# Altium PCB MobileRobot.PcbDoc
Units mil, origin at the board's own origin, x right, y up, seen from the top; angles counter-clockwise.
Board outline 4645.67 x 3188.98 mil, 2 copper layers (Top Layer, Bottom Layer); 85 components, 120 nets, 419 pads, 133 vias.
Unrouted connection lines stored in the file: 2.
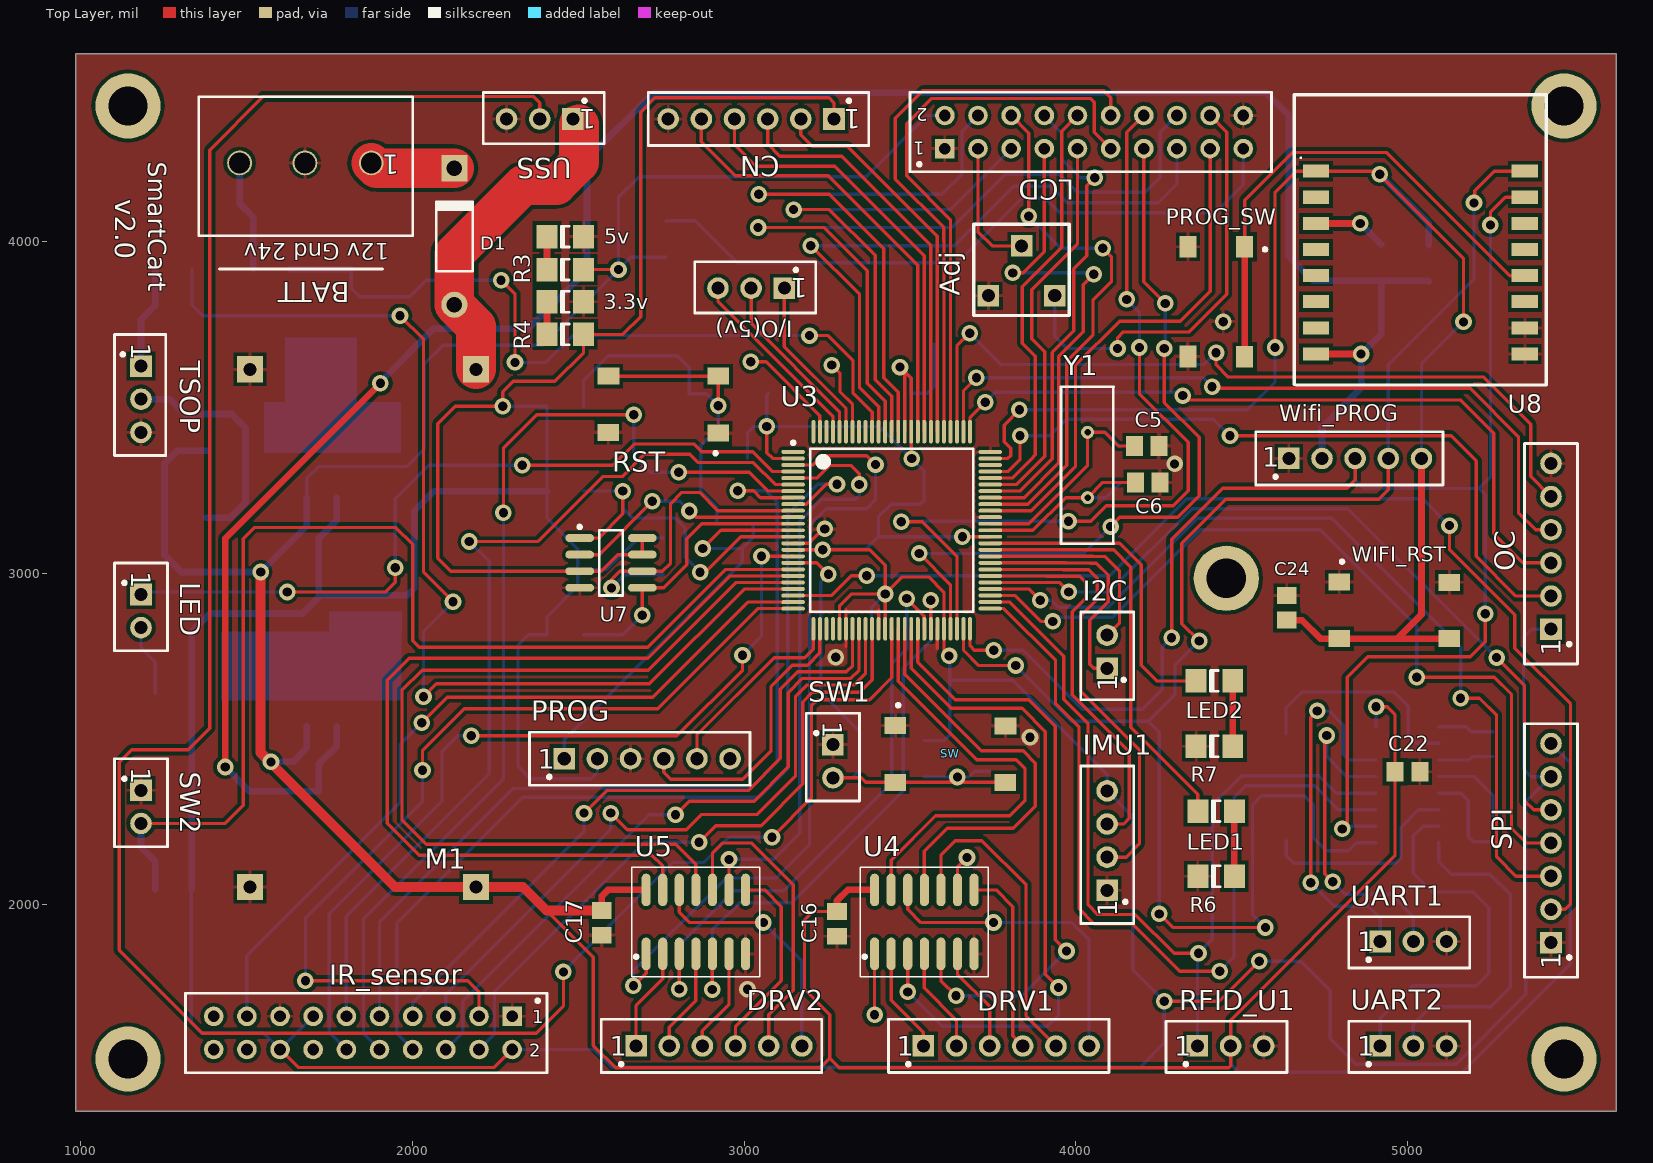
[diagram p0: Top Layer view]
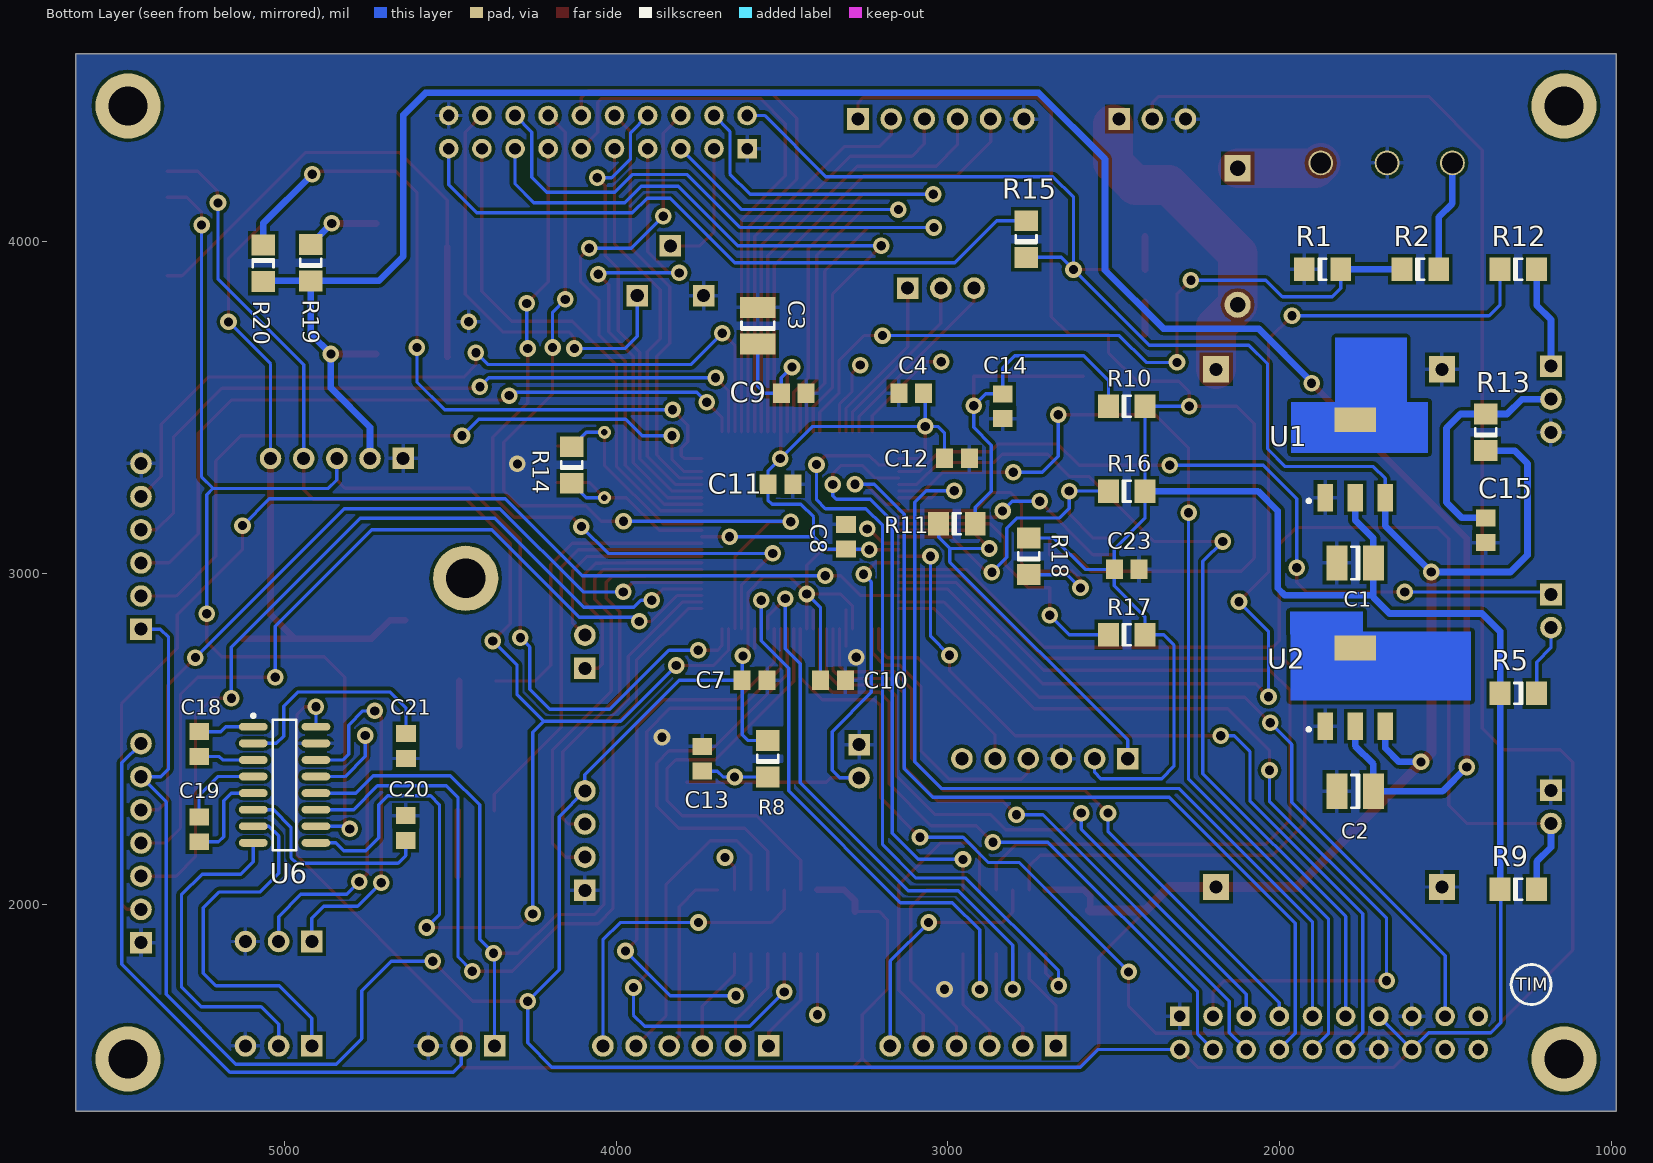
[diagram p1: Bottom Layer view, seen from below]

## Layer stack, top to bottom
Top Solder: solder mask 0.4, Solder Resist, Dk 3.5
Top Layer: signal copper 1.4
Dielectric 1: dielectric 12.6, FR-4, Dk 4.8
Bottom Layer: signal copper 1.4
Bottom Solder: solder mask 0.4, Solder Resist, Dk 3.5

## Board outline
984.25,1377.95 5629.92,1377.95 5629.92,4566.93 984.25,4566.93

## Design rules (kind name [scope] priority, off if disabled: settings)
Clearance Clearance_5 [InNamedPolygon('Bottom Layer-GND Net')] p1: gap=10
Clearance Clearance_4 [InNamedPolygon('Top Layer-GND Net')] p2: gap=11
Clearance Clearance_3 [InNamedPolygon('Bottom Layer-GND Net')] p3: gap=11
Clearance Clearance_2 [InNamedPolygon('Top Layer-GND Net')] p4: gap=11
Clearance Clearance_1 [InNamedPolygon('Bottom Layer-GND Net')] p5: gap=11
Clearance [All] p6: gap=10
PlaneClearance "Schematic Power Plane Clearance_11" [InNet('12V_BAT')] p1: clearance=20
PlaneClearance "Schematic Power Plane Clearance_10" [InNet('NetD3_1')] p2: clearance=20
PlaneClearance "Schematic Power Plane Clearance_9" [InNet('Net5v_1')] p3: clearance=20
PlaneClearance "Schematic Power Plane Clearance_8" [InNet('3.3V_WIFI')] p4: clearance=20
PlaneClearance "Schematic Power Plane Clearance_7" [InNet('3.3V')] p5: clearance=20
PlaneClearance "Schematic Power Plane Clearance_4" [InNet('GND_POWER')] p6: clearance=20
PlaneClearance "Schematic Power Plane Clearance" [InNet('Net3.3v_1')] p7: clearance=20
PlaneClearance "Schematic Power Plane Clearance_3" [InNet('3.3V_WIFI')] p8: clearance=20
PlaneClearance "Schematic Power Plane Clearance_2" [InNet('3.3V')] p9: clearance=20
PlaneClearance "Schematic Power Plane Clearance_1" [InNet('GND_POWER')] p10: clearance=20
PlaneClearance [All] p11: clearance=20
PolygonConnect PolygonConnect_6 [All vs IsNamedPolygon('Top Layer-GND Net')] p1: connectstyle=Relief reliefconductorwidth=10 reliefentries=4 polygonreliefangle="90 Angle" airgapwidth=10
PolygonConnect PolygonConnect_5 [All vs IsNamedPolygon('Bottom Layer-GND Net')] p2: connectstyle=Relief reliefconductorwidth=12 reliefentries=4 polygonreliefangle="90 Angle" airgapwidth=11
PolygonConnect PolygonConnect_4 [All vs IsNamedPolygon('Top Layer-GND Net')] p3: connectstyle=Relief reliefconductorwidth=12 reliefentries=4 polygonreliefangle="90 Angle" airgapwidth=11
PolygonConnect PolygonConnect_3 [All vs IsNamedPolygon('Bottom Layer-GND Net')] p4: connectstyle=Relief reliefconductorwidth=12 reliefentries=4 polygonreliefangle="90 Angle" airgapwidth=11
PolygonConnect PolygonConnect_2 [All vs IsNamedPolygon('Bottom Layer-GND Net')] p5: connectstyle=Relief reliefconductorwidth=12 reliefentries=4 polygonreliefangle="90 Angle" airgapwidth=11
PolygonConnect PolygonConnect_1 [All vs IsNamedPolygon('Top Layer-GND Net')] p6: connectstyle=Relief reliefconductorwidth=12 reliefentries=4 polygonreliefangle="90 Angle" airgapwidth=11
PolygonConnect [All] p7: connectstyle=Relief reliefconductorwidth=10 reliefentries=4 polygonreliefangle="90 Angle" airgapwidth=10
RoutingVias [All] p1: holewidth=28 width=50 viastyle="Through Hole" minholewidth=28 minwidth=50 maxholewidth=28 maxwidth=50
SolderMaskExpansion [All] p1: expansion=4
Width Width2 [InNet('5V')] p1: maxlimit=30 minlimit=10 preferedwidth=20
Width Width1 [InNet('12V_BAT')] p2: maxlimit=120 minlimit=40 preferedwidth=80
Width [All] p3: maxlimit=20 minlimit=10 preferedwidth=10
29 further rules are at their usual default settings.

## Classes and differential pairs
component class Wifi: C24 PROG_SW R19 R20 U8 Wifi_PROG WIFI_RST
component class Power_Supply: 3.3v 5v BATT C1 C2 D1 M1 R1 R2 R3 R4 U1 U2 USS
component class Microcontroller: C3 C4 C5 C6 C7 C8 C9 C10 C11 C12 C13 C14 C15 CN I2C I/O(5v) IMU1 IR_sensor LED LED1 LED2 OC PROG R5 R6 R7 R8 R9 R10 R11 R12 R13 R14 RST SPI SW SW1 SW2 TSOP U3 Y1
component class Memory: C23 R16 R17 R18 U7
component class Level_Shifter: C16 C17 DRV1 DRV2 U4 U5
component class LCD: Adj LCD R15
component class Debug: C18 C19 C20 C21 C22 RFID_U1 U6 UART1 UART2

## Components (designator, comment, footprint, x,y, rotation, side; value= is the part's Value field where it differs from the comment)
3.3v "3.3v_PWR" LED_SMD 2460.63,3818.9 r0 top (schematic designator D3)
5v "5v_PWR" LED_SMD 2460.63,4015.75 r0 top (schematic designator D2)
Adj "RES_POT" "Pot 3pin" 3838.58,3917.32 r0 top (schematic designator Pot)
BATT "H1" BATTERY_3PIN 1850.39,4212.6 r180 top
C1 "10uF/16V / tantalum" CAP_TANTALUM 1771.65,3031.5 r0 bottom
C2 "10uF/16V / tantalum" 1210 1771.65,2342.52 r0 bottom
C3 "10uF/16V / tantalum" CAP_TANTALUM 3573,3747 r90 bottom
C4 "100nF/ 16 Volts" CAP_CERAMIC 3110.24,3543.31 r0 bottom
C5 "22pF" CAP_CERAMIC 4214,3384 r180 top
C6 "22pF" CAP_CERAMIC 4217,3274 r180 top
C7 "100nF/ 16 Volts" CAP_CERAMIC 3582.68,2677.17 r180 bottom
C8 "100nF/ 16 Volts" CAP_CERAMIC 3307.09,3110.24 r90 bottom
C9 "100nF/ 16 Volts" CAP_CERAMIC 3464.57,3543.31 r180 bottom
C10 "100nF/ 16 Volts" CAP_CERAMIC 3346.46,2677.17 r180 bottom
C11 "100nF/ 16 Volts" CAP_CERAMIC 3505,3269 r180 bottom
C12 "100nF/ 16 Volts" CAP_CERAMIC 2972.44,3346.46 r180 bottom
C13 "100nF/ 16 Volts" CAP_CERAMIC 3740.16,2440.94 r90 bottom
C14 "100nF/ 16 Volts" CAP_CERAMIC 2834.65,3503.94 r270 bottom
C15 "100nF/ 16 Volts" CAP_CERAMIC 1377.95,3129.92 r270 bottom
C16 "100nF/ 16 Volts" CAP_CERAMIC 3280,1943 r270 top
C17 "100nF/ 16 Volts" CAP_CERAMIC 2571,1946 r270 top
C18 "1uF" CAP_CERAMIC 5258,2485 r270 bottom
C19 "1uF" CAP_CERAMIC 5258,2228 r270 bottom
C20 "1uF" CAP_CERAMIC 4635,2232 r90 bottom
C21 "1uF" CAP_CERAMIC 4634,2479 r270 bottom
C22 "100nF/ 16 Volts" CAP_CERAMIC 5000,2401.57 r0 top
C23 "100nF/ 16 Volts" CAP_CERAMIC 2460.63,3011.81 r0 bottom
C24 "100nF/ 16 Volts" CAP_CERAMIC 4636,2896 r90 top
CN "H4" 1x6_single 3070.87,4370.08 r180 top
D1 "Diode 1N4007" D-IN4007 2125.98,4015.75 r90 top
DRV1 "1Step/2DC" 1x6_single 3740.16,1574.8 r0 top
DRV2 "1Step/2DC" 1x6_single 2874.02,1574.8 r0 top
I2C "H6" 1x2_single 4094.49,2913.39 r90 top
I/O(5v) "H7" "1x3_single - duplicate" 2921,3860 r180 top (schematic designator 5v_OUT)
IMU1 "Header 4" 1x4_single 4094.49,2244.09 r90 top
IR_sensor "Header 10X2A" "10x2 row_ 2.54mm pitch" 1850.39,1614.17 r180 top
LCD "Header 10X2A" "10x2 row_ 2.54mm pitch" 4055.12,4330.71 r0 top
LED "H8" 1x2_single 1181.1,2736.22 r270 top
LED1 "LED1" LED_SMD 4423.19,2283.17 r0 top (schematic designator D4)
LED2 "LED2" LED_SMD 4418.19,2675.46 r0 top (schematic designator D5)
M1 "Buck Regulator" BUCKREGULATOR 1850.39,2834.65 r0 top
OC "H3" 1x6_single 5433.07,3031.5 r90 top
PROG "H10" 1x6_single 2657.48,2440.94 r0 top
PROG_SW "SW-SMD" SWITCH_SMD 4409.45,3818.9 r90 top
R1 "100K" RES_SMD 1870.08,3917.32 r180 bottom
R2 "1M" RES_SMD 1574.8,3917.32 r180 bottom
R3 "330R" RES_SMD 2460,3916 r0 top
R4 "330R" RES_SMD 2460.63,3720.47 r0 top
R5 "47R" RES_SMD 1279.53,2637.8 r0 bottom
R6 "150R" RES_SMD 4423.19,2086.31 r0 top
R7 "150R" RES_SMD 4418.19,2478.61 r0 top
R8 "10K" RES_SMD 3543.31,2440.94 r90 bottom
R9 "10K" RES_SMD 1279.53,2047.24 r180 bottom
R10 "4.7K" RES_SMD 2460.63,3503.94 r180 bottom
R11 "1K" RES_SMD 2972.44,3149.61 r180 bottom
R12 "220R" RES_SMD 1279.53,3917.32 r180 bottom
R13 "220R" RES_SMD 1377.95,3425.2 r90 bottom
R14 "1M" RES_SMD 4133.86,3326.77 r90 bottom
R15 "47R" RES_SMD 2764,4008 r90 bottom
R16 "4.7K" RES_SMD 2460.63,3248.03 r180 bottom
R17 "4.7K" RES_SMD 2460.63,2814.96 r180 bottom
R18 "4.7K" RES_SMD 2755.91,3051.18 r90 bottom
R19 "10K" RES_SMD 4921.26,3937.01 r90 bottom
R20 "10K" RES_SMD 5065,3935 r270 bottom
RFID_U1 "H15" "1x3_single - duplicate" 4566.93,1574.8 r0 top
RST "SW-SMD" SWITCH_SMD 2755.91,3523.62 r0 top
SPI "H5" 1x7_single 5433.07,2086.61 r90 top
SW "SW-SMD" SWITCH_SMD 3622.05,2440.94 r180 top
SW1 "H11" 1x2_single 3267.72,2283.46 r270 top
SW2 "H12" 1x2_single 1181.1,2145.67 r270 top
TSOP "H9" "1x3_single - duplicate" 1181.1,3425.2 r270 top
U1 "LM1117" LM1117 1771.65,3228.35 r180 bottom
U2 "LM1117" LM1117 1771.65,2539.37 r180 bottom
U3 "DSPIC33FJ256MC710A-I/PF" DSPIC33FJ256MC710-I/PF 3444.88,3129.92 r0 top
U4 "SN74HCT14MDREP" SN74HCT14MDREP 3543.31,1948.82 r90 top
U5 "SN74HCT14MDREP" SN74HCT14MDREP 2854.33,1948.82 r90 top
U6 "MAX3232D" MAX232D 5000,2362.2 r180 bottom
U7 "25LC256" 25LC256 2598.43,3031.5 r0 top
U8 "esp8266-07" esp8266-07 5039,3898 r0 top
UART1 "H13" "1x3_single - duplicate" 5118.11,1889.76 r0 top
UART2 "H14" "1x3_single - duplicate" 5118.11,1574.8 r0 top
USS "H2" "1x3_single - duplicate" 2283.46,4370.08 r180 top
Wifi_PROG "H18" 1x5_single 4842.52,3346.46 r0 top
WIFI_RST "SW-SMD" SWITCH_SMD 4960.63,2874.02 r180 top
Y1 "10MHz" CRYSTAL_10MHZ 4035.43,3326.77 r90 top

## Footprints (in the part's own frame and the unit in brackets; to place one, negate y for a bottom-side part, rotate by r counter-clockwise, add the part's x,y. Pads: shape width x height; smd on the part's side, far side on the other; paste and mask are expansions set on the pad)
1x2_single [mm] "Connector; IDC, Low Profile Male Header, Thru-Hole; 10 Position; Vertical; Pitch 2.54 mm; Body 20.32 x 9.2 x 9.45 mm (LxWxH)"
  rect 1.65x1.65 hole 1: 1(-5.08,0)
  round 1.65 hole 1: 2(-2.54,0)
  silkscreen extent -7.49,-2.03 -0.76,2.03
"1x3_single - duplicate" [mm] "Connector; IDC, Low Profile Male Header, Thru-Hole; 10 Position; Vertical; Pitch 2.54 mm; Body 20.32 x 9.2 x 9.45 mm (LxWxH)"
  rect 1.65x1.65 hole 1: 1(-5.08,0)
  round 1.65 hole 1: 2(-2.54,0) 3(0,0)
  silkscreen extent -7.49,-2.03 1.78,1.91
1x4_single [mm] "Connector; IDC, Low Profile Male Header, Thru-Hole; 10 Position; Vertical; Pitch 2.54 mm; Body 20.32 x 9.2 x 9.45 mm (LxWxH)"
  rect 1.65x1.65 hole 1: 1(-5.08,0)
  round 1.65 hole 1: 2(-2.54,0) 3(0,0) 4(2.54,0)
  silkscreen extent -7.62,-2.03 4.45,2.03
1x5_single [mm] "Connector; IDC, Low Profile Male Header, Thru-Hole; 10 Position; Vertical; Pitch 2.54 mm; Body 20.32 x 9.2 x 9.45 mm (LxWxH)"
  rect 1.65x1.65 hole 1: 1(-5.08,0)
  round 1.65 hole 1: 2(-2.54,0) 3(0,0) 4(2.54,0) 5(5.08,0)
  silkscreen extent -7.62,-2.03 6.73,2.03
1x6_single [mm] "Connector; IDC, Low Profile Male Header, Thru-Hole; 10 Position; Vertical; Pitch 2.54 mm; Body 20.32 x 9.2 x 9.45 mm (LxWxH)"
  rect 1.65x1.65 hole 1: 1(-5.08,0)
  round 1.65 hole 1: 2(-2.54,0) 3(0,0) 4(2.54,0) 5(5.08,0) 6(7.62,0)
  silkscreen extent -7.75,-2.03 9.14,2.03
1x7_single [mm] "Connector; IDC, Low Profile Male Header, Thru-Hole; 10 Position; Vertical; Pitch 2.54 mm; Body 20.32 x 9.2 x 9.45 mm (LxWxH)"
  rect 1.65x1.65 hole 1: 1(-5.08,0)
  round 1.65 hole 1: 2(-2.54,0) 3(0,0) 4(2.54,0) 5(5.08,0) 6(7.62,0) 7(10.16,0)
  silkscreen extent -7.75,-2.03 11.68,2.03
"10x2 row_ 2.54mm pitch" [mm] "Connector; IDC, PCB Transition - 2 Rows, Thru-Hole; 34 Position; Vertical; Pitch 2.54 mm; dual row"
  rect 1.5x1.5 hole 0.9: 1(-11.43,-1.27)
  round 1.5 hole 0.9: 2(-11.43,1.27) 3(-8.89,-1.27) 4(-8.89,1.27) 5(-6.35,-1.27) 6(-6.35,1.27) 7(-3.81,-1.27) 8(-3.81,1.27) 9(-1.27,-1.27) 10(-1.27,1.27) 11(1.27,-1.27) 12(1.27,1.27) 13(3.81,-1.27) 14(3.81,1.27) 15(6.35,-1.27) 16(6.35,1.27) 17(8.89,-1.27) 18(8.89,1.27) 19(11.43,-1.27) 20(11.43,1.27)
  silkscreen extent -14.1,-3.05 13.59,3.05
25LC256 [mm] "SOIC, 8-Leads, Body 4.9x3.8mm, Pitch 1.27mm, IPC Medium Density"
  oval 2.2x0.6 smd: 1(-2.4,1.905) 2(-2.4,0.635) 3(-2.4,-0.635) 4(-2.4,-1.905) 5(2.4,-1.905) 6(2.4,-0.635) 7(2.4,0.635) 8(2.4,1.905)
  silkscreen extent -2.52,-2.5 0.9,2.88, body extent -2,-2.5 2,2.5, height 1.75
1210 [mm]
  rect 1.6x2.7 smd: 1(-1.4,0) 2(1.4,0)
  silkscreen extent -0.3,-1.25 0.3,1.25
BATTERY_3PIN [mm] "Through Hole Power Connector 5.54X6.5 _ 6A"
  round 1.9 hole 1.6: 1(-0.635,-0.635) 2(4.445,-0.635) 3(9.449,-0.635)
  silkscreen extent -3.81,-5.72 12.57,4.95
BUCKREGULATOR [mm] "43mm length,20 mm width"
  rect 2.008x2.008 hole 1: Vin+(8.65,19.825) Vin-(-8.65,19.825) Vout+(8.65,-19.825) Vout-(-8.65,-19.825)
  body extent -10.24,-21.71 9.95,21.97, height 5
CAP_CERAMIC [mm] "Chip Capacitor; Body 2.0 x 1.2 mm (LxW typ)"
  rect 1.3x1.5 smd: 1(0.95,0) 2(-0.95,0)
CAP_TANTALUM [mm] "Chip Capacitor; Body 3.2 x 2.5 mm (LxW typ)"
  rect 1.6x2.7 smd: 1(-1.4,0) 2(1.4,0)
  silkscreen extent -0.3,-1.25 0.3,1.25
CRYSTAL_10MHZ [mm] "0.413\" L x 0.183\" W (10.50mm x 4.65mm)"
  round 1 hole 0.5: 1(-2.5,0) 2(2.5,0)
  silkscreen extent -6.02,-2 6,2.03
D-IN4007 [mm] "Diode, Axial; Body 5.2 x 2.7 mm (LxDia. max), Lead Dia. 0.86 mm (max)"
  round 2 hole 1.2: 1(-5.23,0)
  rect 2x2 hole 1.2: 2(5.23,0)
  silkscreen extent -2.65,-1.4 2.75,1.4
DSPIC33FJ256MC710-I/PF [mm] "Thin QFP, 100-Leads, Body 14x14mm, Pitch 0.5mm, IPC Medium Density"
  oval 1.8x0.3 smd: 1(-7.55,6) 2(-7.55,5.5) 3(-7.55,5) 4(-7.55,4.5) 5(-7.55,4) 6(-7.55,3.5) 7(-7.55,3) 8(-7.55,2.5) 9(-7.55,2) 10(-7.55,1.5) 11(-7.55,1) 12(-7.55,0.5) 13(-7.55,0) 14(-7.55,-0.5) 15(-7.55,-1) 16(-7.55,-1.5) 17(-7.55,-2) 18(-7.55,-2.5) 19(-7.55,-3) 20(-7.55,-3.5) 21(-7.55,-4) 22(-7.55,-4.5) 23(-7.55,-5) 24(-7.55,-5.5) 25(-7.55,-6) 51(7.55,-6) 52(7.55,-5.5) 53(7.55,-5) 54(7.55,-4.5) 55(7.55,-4) 56(7.55,-3.5) 57(7.55,-3) 58(7.55,-2.5) 59(7.55,-2) 60(7.55,-1.5) 61(7.55,-1) 62(7.55,-0.5) 63(7.55,0) 64(7.55,0.5) 65(7.55,1) 66(7.55,1.5) 67(7.55,2) 68(7.55,2.5) 69(7.55,3) 70(7.55,3.5) 71(7.55,4) 72(7.55,4.5) 73(7.55,5) 74(7.55,5.5) 75(7.55,6)
  oval 0.3x1.8 smd: 26(-6,-7.55) 27(-5.5,-7.55) 28(-5,-7.55) 29(-4.5,-7.55) 30(-4,-7.55) 31(-3.5,-7.55) 32(-3,-7.55) 33(-2.5,-7.55) 34(-2,-7.55) 35(-1.5,-7.55) 36(-1,-7.55) 37(-0.5,-7.55) 38(0,-7.55) 39(0.5,-7.55) 40(1,-7.55) 41(1.5,-7.55) 42(2,-7.55) 43(2.5,-7.55) 44(3,-7.55) 45(3.5,-7.55) 46(4,-7.55) 47(4.5,-7.55) 48(5,-7.55) 49(5.5,-7.55) 50(6,-7.55) 76(6,7.55) 77(5.5,7.55) 78(5,7.55) 79(4.5,7.55) 80(4,7.55) 81(3.5,7.55) 82(3,7.55) 83(2.5,7.55) 84(2,7.55) 85(1.5,7.55) 86(1,7.55) 87(0.5,7.55) 88(0,7.55) 89(-0.5,7.55) 90(-1,7.55) 91(-1.5,7.55) 92(-2,7.55) 93(-2.5,7.55) 94(-3,7.55) 95(-3.5,7.55) 96(-4,7.55) 97(-4.5,7.55) 98(-5,7.55) 99(-5.5,7.55) 100(-6,7.55)
  silkscreen extent -7.67,-6.25 6.25,6.82, body extent -7,-7 7,7, height 1.2
esp8266-07 [mm] "TSOP, 8-Leads, Body 2.90x1.63mm, Pitch 0.65mm, IPC Medium Density"
  rect 2x1 smd: 0(-8,8) 1(-8,6) 2(-8,4) 3(-8,2) 4(-8,0) 5(-8,-2) 6(-8,-4) 7(-8,-6) 8(8,-6) 9(8,-4) 10(8,-2) 11(8,0) 12(8,2) 13(8,4) 14(8,6) 15(8,8)
  silkscreen extent -9.65,-8.38 9.65,13.84, body extent -8.53,-7.42 8.46,12.88, height 1.45
LED_SMD [mm] "Chip Capacitor; Body 6.4 x 3.2 mm (LxW typ)"
  rect 1.6x1.8 smd: 1(-1.4,0) 2(1.4,0)
  silkscreen extent -0.3,-0.8 0.3,0.8
LM1117 [mm] "SOT23, 3-Leads, Body 2.9x1.3mm, Pitch 0.95mm, Lead Span 2.5mm, IPC Low Density"
  rect 3.175x1.905 smd: 0(0,5.969)
  rect 1.2x2.1 smd: 1(-2.3,0) 2(0,0) 3(2.3,0)
  silkscreen extent -3.68,-0.38 -3.43,-0.13, body extent -3.84,0.91 3.84,5.31, height 1.1
MAX232D [mm] "SOIC, 16-Leads, Body 9.9x3.9mm, Pitch 1.27mm, IPC Medium Density"
  oval 2.2x0.6 smd: 1(-2.4,4.445) 2(-2.4,3.175) 3(-2.4,1.905) 4(-2.4,0.635) 5(-2.4,-0.635) 6(-2.4,-1.905) 7(-2.4,-3.175) 8(-2.4,-4.445) 9(2.4,-4.445) 10(2.4,-3.175) 11(2.4,-1.905) 12(2.4,-0.635) 13(2.4,0.635) 14(2.4,1.905) 15(2.4,3.175) 16(2.4,4.445)
  silkscreen extent -2.53,-5 0.9,5.42, body extent -1.95,-4.95 1.95,4.95, height 1.75
"Pot 3pin" [mm] "Through hole"
  rect 1.65x1.65 hole 1: 1(2.489,-2.032) 2(-0.051,1.778) 3(-2.591,-2.032)
  silkscreen extent -3.71,-3.56 3.61,3.43
RES_SMD [mm] "Chip Capacitor; Body 6.4 x 3.2 mm (LxW typ)"
  rect 1.6x1.8 smd: 1(-1.4,0) 2(1.4,0)
  silkscreen extent -0.3,-0.8 0.3,0.8
SN74HCT14MDREP [mm] "14-Pin Small Outline Integrated Circuit 1.27 mm Pitch, IPC Low Density"
  oval 2.5x0.7 smd: 1(-2.45,3.81) 2(-2.45,2.54) 3(-2.45,1.27) 4(-2.45,0) 5(-2.45,-1.27) 6(-2.45,-2.54) 7(-2.45,-3.81) 8(2.45,-3.81) 9(2.45,-2.54) 10(2.45,-1.27) 11(2.45,0) 12(2.45,1.27) 13(2.45,2.54) 14(2.45,3.81)
  silkscreen extent -4.2,-4.9 4.2,4.9, body extent -2,-4.38 2,4.38, height 1.75
SWITCH_SMD [mm] "Switch, Push Button, Tactile"
  rect 1.65x1.3 smd: 1(4.216,-2.54) 2(-4.216,-2.515) 3(4.216,1.803) 4(-4.191,1.803)
  silkscreen extent 3.88,-4.22 4.13,-3.97, body extent -4.57,-3.35 4.57,2.67, height 1.75

## Part data
3.3v 5v LED1 LED2: library part LED_SMD, "Typical INFRARED GaAs LED_throughole"
Adj: "Tapped Resistor"
BATT: library part BATTERY_3PIN, "Header, 3-Pin"
C1 C2 C3: library part C_0
C4 C5 C6 C7 C8 C9 C10 C11 C12 C13 C14 C15 C16 C17 C18 C19 C20 C21 C22 C23 C24: library part "CAP NP"
CN DRV1 DRV2 OC PROG: library part "Header 6", "Header, 6-Pin"
D1: "1 Amp General Purpose Rectifier"
I2C LED SW1 SW2: library part "Header 2", "Header, 2-Pin"
I/O(5v) RFID_U1 TSOP UART1 UART2 USS: library part "Header 3", "Header, 3-Pin"
IMU1: "Header, 4-Pin"
IR_sensor LCD: library part "Header 10x2", "Header, 20Pin, Dual row"
M1: library part Regulator, "buck regulator\"
PROG_SW RST SW WIFI_RST: "Switch"
R1 R2 R3 R4 R5 R6 R7 R8 R9 R10 R11 R12 R13 R14 R15 R16 R17 R18 R19 R20: library part RESISTOR
SPI: library part "Header 7_1", "Header, 6-Pin"
U3: library part DSPIC33FJ256MC710-I/PF, "High-Performance 16-bit Digital Signal Controller, 256 KB Flash, 30 KB RAM, 100-Pin TQFP, Industrial Temperature"
U4 U5: library part 74HC153D
U6: library part MAX232D, "Dual EIA-232 Driver/Receiver"
U8: "4-Bit Loadable Cascadable Binary Counter with Clock Enable and Asynchronous Clear, Single Pin Version"
Wifi_PROG: library part "Header 5", "Header, 5-Pin"
Y1: library part XTAL, "Crystal Oscillator"

## Free pads (board coordinates)
  round 196.85 hole 118.11: 1(1141.73,4409.45) 2(1141.73,1535.43) 3(5472.44,1535.43) 4(5472.44,4409.45) 5(4454,2985)

## Via types
v1: diameter 50, hole 28, Top Layer to Bottom Layer, 133 vias

## Nets (pads, with @x,y where several pads share a name; then routed paths per layer and width w, separated by ;. In a path a pad name is that pad's centre, name@x,y a point inside that pad or via, vN(x,y) a via of type N, cw(c..) or ccw(c..) an arc to the next point about the centre after c; other vN are vias at no path point)
3.3V: C1.1 C3.1 C4.2 C7.2 C8.2 C9.2 C10.2 C11.2 C12.2 C23.1 CN.1 IMU1.4 IR_sensor.2 IR_sensor.13 IR_sensor.16 OC.1 PROG.2 R4.2 R5.2 R8.2 R9.1 R10.2 R16.2 R17.2 R18.2 SPI.6 U1.2 U3.2 U3.16 U3.30 U3.37 U3.46 U3.62 U3.85 U3.86 U7.3 U7.7 U7.8 | length 19690.1
  Top Layer w10: IR_sensor.16 1654.57,1510 2246.22,1510 IR_sensor.2 ; U7.8 U7.7 2618.5,3056.5 2568.5,3006.5 U7.3 2115.5,3006.5 2076,3046 2076,3451 2129,3504 v1(2272,3504) 2272,3547 2304,3579 2429,3579 2515.75,3665.75 R4.2 2634.47,3720.47 2688,3774 2688,4391 2731,4434 3256,4434 3270.87,4419.13 CN.1 ; v1(3068,3443) 3068,3364 3085.54,3346.46 U3.2 ; U3.16 v1(3236.87,3070.87) 3379.13,3070.87 3425.2,3024.8 v1(3425.2,2937.8) ; U3.30 3287.4,2901.4 3323.8,2937.8 v1(3425.2,2937.8) ; U3.37 v1(3425.2,2937.8) ; v1(3470,3622) v1@3484.25,3607.75 ; U3.86 v1@3484.25,3607.75 ; v1(3505,3346) 3503.94,3347.06 U3.85 3503.94,3588.06 v1@3484.25,3607.75 ; v1(3618,2751) 3602.36,2766.64 U3.46 3602.36,2942.64 3556,2989 3476.39,2989 v1(3425.2,2937.8) ; v1(3658.24,3110.24) U3.62 ; v1(4267,1710) 4433,1710 v1(4553,1830)
  Bottom Layer w10: R9.1@1333,2047.24 1333,1644 1362,1615 1549.57,1615 IR_sensor.16 IR_sensor.13 ; v1(2272,3504) 2272.06,3503.94 R10.2 R16.2 2405.51,3165.49 2498.03,3072.97 C23.1 ; IR_sensor.2 2546.83,1564.17 2600,1511 4194,1511 4267,1584 v1(4267,1710) 4172,1805 4172,2266.58 IMU1.4 4094.49,2392.51 3809.83,2677.17 C7.2 ; PROG.2 2557.48,2399.48 2539,2381 2355,2381 2318,2418 2318,2784 2348.96,2814.96 R17.2 2405.51,2869.51 2498.03,2962.03 C23.1 ; R18.2 2680.3,3106.3 2585.81,3011.81 C23.1 ; C12.2 3009.84,3422.84 3030,3443 v1(3068,3443) ; C4.2 3068,3538.47 v1(3068,3443) ; v1(3236.87,3070.87) 3238.83,3072.83 C8.2 3366.83,3072.83 3405,3111 ; C10.2 3383.86,2896.46 v1(3425.2,2937.8) ; v1(3470,3622) 3501.97,3590.03 C9.2 3552.31,3543.31 3573,3564 C3.1 ; R8.2 3603.06,2496.06 3620.08,2513.08 C7.2 ; v1(3618,2751) 3620.08,2748.92 C7.2 ; v1(3658.24,3110.24) 3405.76,3110.24 3405,3111 ; v1(4553,1830) 4678,1830 4767,1741 4767,1597 4844,1520 5147,1520 5357,1730 5357,2310.54 SPI.6 5373.39,2386.61 5350,2410 5350,2807 5374.5,2831.5 OC.1 ; v1(3068,3443) 3408,3443 v1(3505,3346) 3542.4,3308.6 C11.2 3542.4,3220.4 3530,3208 3443,3208 3405,3170 3405,3111
  Bottom Layer w20: R9.1 1334.65,2824.65 1389,2879 1668,2879 1716.53,2927.53 1716.53,2933.47 ; U1.2 1771.65,3160.65 1716.53,3105.53 C1.1 1716.53,2933.47 ; R16.2 2065.03,3248.03 2005,3188 2005,2955 1983.47,2933.47 1716.53,2933.47
3.3V_WIFI: C2.1 R19.1 R20.2 U2.2 U8.7 Wifi_PROG.2 | length 6837.7
  Top Layer w20: v1(1435,2416) 1435,3105 v1(1903,3573) ; U8.7@4724.04,3661.42 v1(4860.42,3661.42)
  Bottom Layer w20: v1(1435,2416) 1508.48,2342.52 C2.1 1716.53,2424.53 1771.65,2479.65 U2.2 ; v1(1903,3573) 1903,3578 2063,3738 2350,3738 2526,3914 2526,4249 2726,4449 4575,4449 4642,4382 4642,3956 4716.11,3881.89 R19.1 ; Wifi_PROG.2 4742.52,3440.52 4860.42,3558.42 v1(4860.42,3661.42) 4921.26,3722.26 R19.1 ; R20.2 5062.99,3881.89 R19.1
5V: C16.2 C17.2 C22.2 LCD.2 M1.Vout+ R3.2 R13.1 R15.1 RFID_U1.2 SPI.7 U1.3 U2.3 U4.14 U5.14 U6.16 | length 12604.8
  Top Layer w10: 2403.6,1983.4 2545,1842 2545,1576 2612,1509 3229,1509 3258,1538 ; R3.2 v1(2621,3916) ; C16.2 3207.4,1980.4 3182,1955 3182,1745 3258,1669 3258,1538 ; v1(4905.51,2597.51) 4939.49,2597.51 4962.6,2574.4 C22.2 4962.6,2148.6 4466.93,1652.93 RFID_U1.2 4466.93,1514.93 4461,1509 3287,1509 3258,1538
  Top Layer w20: C17.2 2571,2027 2589.27,2045.27 U5.14 ; C16.2 3280,2013 3312.27,2045.27 U4.14
  Top Layer w30: v1(1542,3004) 1542,2459 v1@1573,2428 ; v1@1573,2427 v1@1573,2428 ; v1(1573,2431.27) v1@1573,2428 ; C17.2 2403.6,1983.4 2332.87,2054.13 M1.Vout+ 1946.87,2054.13 v1@1573,2428
  Bottom Layer w10: U1.3 1681.1,3286.1 1717,3322 1983,3322 2036,3375 2036,3632 2092,3688 2393,3688 v1(2621,3916) ; R15.1 2657.88,3952.88 v1(2621,3916) ; LCD.2 3552.71,4380.71 3368,4196 2683,4196 2621,4134 v1(2621,3916) ; RFID_U1.2 4466.93,1519.07 4491,1495 5165,1495 5491,1821 5491,2428.68 SPI.7 ; U6.16 v1(4905.51,2597.51)
  Bottom Layer w20: R13.1 1291.08,3370.08 1252,3331 1252,3055 1303,3004 v1(1542,3004) 1681.1,3143.1 U1.3 ; v1(1573,2431.27) 1639.27,2431.27 1681.1,2473.1 U2.3
12V_BAT: D1.1 M1.Vin+ USS.1 | length 1002.8
  Top Layer w80: USS.1@2485.95,4370.08 USS.1@2502,4354.02
  Top Layer w120: M1.Vin+ 2190.94,3744.88 D1.1 2125.98,3962.98 2334,4171 2434,4171 2502,4239 USS.1@2502,4354.02
"24V BAT": BATT.3 R2.2 | length 337.4
  Bottom Layer w20: BATT.3 1478.39,4115.61 1519.69,4074.31 R2.2
CN1: CN.2 U3.81 | length 1174.9
  Top Layer w10: CN.2 3170.87,4323.13 3207,4287 3312,4287 3582.05,4016.95 3582.05,3992.04 3582.36,3991.72 3582.36,3991.32 ; U3.81 3582.68,3991.32
CN2: CN.3 U3.82 | length 1256.3
  Top Layer w10: CN.3 3070.87,4295.13 3108,4258 3295,4258 3562.99,3990.01 U3.82
CN3: CN.4 U3.83 | length 1319.2
  Top Layer w10: CN.4 2970.87,4292.13 3035,4228 3273,4228 3542.68,3958.32 3542.68,3954.69 ; U3.83 3543.31,3954.69
CN4: CN.5 U3.84 | length 1377.8
  Top Layer w10: CN.5 2870.87,4301.13 2973,4199 3254,4199 3523.31,3929.69 3523.31,3796.38 ; U3.84 3523.62,3796.38
CS1: LCD.15 U3.90 | length 1973.9
  Top Layer w10: v1(3201,3988) 3348,3841 3348,3560 3405.51,3502.49 U3.90
  Bottom Layer w10: v1(3201,3988) 3634,3988 3813,4167 3925,4167 3974,4118 4249,4118 4305.12,4174.12 LCD.15
CS2: LCD.16 U3.89 | length 2418.3
  Top Layer w10: v1(3042,4043) 3240,4043 3371,3912 3371,3573 3425.2,3518.8 U3.89
  Bottom Layer w10: v1(3042,4043) 3627,4043 3787,4203 3950,4203 4004,4149 4210,4149 4255,4194 4255,4330.59 LCD.16
DB0: LCD.7 U3.68 | length 1543.6
  Top Layer w10: U3.68 3844.35,3228.35 3949,3333 3949,3654 4023,3728 4023,3871 v1(4054,3902) ; v1(3810,3906) 3842,3906 3905.12,3969.12 LCD.7
  Bottom Layer w10: v1(3810,3906) 4054,3906 v1(4054,3902)
DB1: LCD.8 U3.69 | length 1403.3
  Top Layer w10: U3.69 3831.03,3248.03 3929,3346 3929,3666 3994,3731 3994,3918 4033,3957 4033,4169 v1(4057,4193)
  Bottom Layer w10: LCD.8 3956.83,4329 3956.83,4250.17 4014,4193 v1(4057,4193)
DB2: LCD.9 U3.70 | length 1200.3
  Top Layer w10: U3.70 3820.72,3267.72 3906,3353 3906,3668 3867,3707 3867,3855 4005.12,3993.12 LCD.9
DB3: LCD.10 U3.71 | length 1273.4
  Top Layer w10: U3.71 3808.4,3287.4 3865.54,3344.54 3878,3357 3878,3655 3839,3694 3839,3864 3958,3983 3958,4333.59 LCD.10
DB4: LCD.11 U3.79 | length 1745.6
  Top Layer w10: U3.79 3622.05,4066.95 3490,4199 3490,4356 3566,4432 4044,4432 4056,4420 4056,4329.83 LCD.11
DB5: LCD.12 U3.80 | length 1751.3
  Top Layer w10: 3602.05,4000.64 3602.05,4042.95 3456,4189 3456,4372 3539,4455 4085,4455 4105.12,4434.88 LCD.12 ; U3.80 3602.36,4000.64
DB6: LCD.13 U3.47 | length 2300.7
  Top Layer w10: v1(3528,3060) 3622.05,2965.95 U3.47 ; v1(4105,3141) 4133,3169 4307,3169 4372,3234 4372,3410 4267,3515 v1(4267,3678) ; LCD.13 4205.12,3878.88 v1(4270,3814)
  Bottom Layer w10: v1(3528,3060) 4024,3060 v1(4105,3141) ; v1(4267,3678) 4270,3681 v1(4270,3814)
DB7: LCD.14 U3.48 | length 2563.3
  Top Layer w10: v1(3474,3156) 3537,3156 3641.73,3051.27 U3.48 ; v1(3978,3157) 4045,3157 4092,3204 4294,3204 4339,3249 4339,3395 4192,3542 v1(4192,3681) ; v1(4154,3826) 4154,4329.59 LCD.14
  Bottom Layer w10: v1(3474,3156) 3474,3157 v1(3978,3157) ; v1(4154,3826) 4192,3788 v1(4192,3681)
DIR1+: U3.42 U4.5 | length 1821.1
  Top Layer w10: U3.42 3523.62,2732.38 3637,2619 3858,2619 3938,2539 3938,1895 v1(3972,1861) ; U4.5 3593.31,1771.69 v1(3639,1726)
  Bottom Layer w10: v1(3639,1726) 3837,1726 v1(3972,1861)
DIR1+_5V: DRV1.3 U4.6 | length 317.7
  Top Layer w10: U4.6 3643.31,1791.69 3740.16,1694.84 DRV1.3
DIR1-: U3.39 U4.13 | length 1314
  Top Layer w10: U4.13 3443.31,2135.31 3577,2269 3801,2269 3847,2315 3847,2411 3820,2438 3701,2438 3464.57,2674.43 U3.39
DIR1-_5V: DRV1.6 U4.12 | length 963.5
  Top Layer w10: U4.12 3493.31,1986.69 3533,1947 v1(3752,1947)
  Bottom Layer w10: v1(3752,1947) 3988,1947 4040.16,1894.84 DRV1.6
DIR2+: U3.44 U5.5 | length 1732.6
  Top Layer w10: v1(2904,1745) 2904,1852.03 U5.5 ; U3.44 v1(3562.99,2918.99)
  Bottom Layer w10: v1(2904,1745) 2904,1924.79 2986.21,2007 3143,2007 3480,2344 3480,2714 3562.99,2796.99 v1(3562.99,2918.99)
DIR2+_5V: DRV2.3 U5.6 | length 310.8
  Top Layer w10: DRV2.3 2874.02,1620.02 2954.33,1700.33 U5.6
DIR2-: U3.20 U5.13 | length 2741.6
  Top Layer w10: U5.13 2754.33,2117.67 2722,2150 2020,2150 1924,2246 1924,2678 1990,2744 2710,2744 2958.13,2992.13 U3.20
DIR2-_5V: DRV2.6 U5.12 | length 753.6
  Top Layer w10: U5.12 2804.33,1978.67 2836,1947 v1(3058,1947)
  Bottom Layer w10: v1(3058,1947) 3174.02,1830.98 DRV2.6
EN: LCD.6 U3.67 | length 1589.4
  Top Layer w10: U3.67 3855.66,3208.66 3973,3326 3973,3640 4052,3719 4052,3825 4108,3881 4108,3953 v1(4081,3980) ; LCD.6 3858,4327.83 v1(3858,4077)
  Bottom Layer w10: v1(3858,4077) 3955,3980 v1(4081,3980)
ENA1+_BRK1: U3.41 U4.3 | length 2100.4
  Top Layer w10: v1(3493.31,1737.69) U4.3 ; U3.41 3503.94,2713.06 3624,2593 3838,2593 3908,2523 3908,1791 v1(3948,1751)
  Bottom Layer w10: v1(3493.31,1737.69) 3597,1634 3914,1634 3948,1668 v1(3948,1751)
ENA1+_BRK1_5V: DRV1.2 U4.4 | length 317.7
  Top Layer w10: U4.4 3543.31,1749.69 3640.16,1652.84 DRV1.2
ENA1-_BRK3: U3.40 U4.11 | length 1279.5
  Top Layer w10: U3.40 3484.25,2695.75 3715,2465 3841,2465 3878,2428 3878,2298 3811,2231 3612,2231 3543.31,2162.31 U4.11
ENA1-_BRK3_5V: DRV1.5 U4.10 | length 958.5
  Top Layer w10: U4.10 3593.31,2150.31 3637,2194 3717,2194 3850,2061 3850,1664.96 DRV1.5
ENA2+_BRK2: U3.43 U5.3 | length 1769.6
  Top Layer w10: v1(2804.33,1746.33) U5.3 ; v1(3490,2924) 3543.31,2870.69 U3.43
  Bottom Layer w10: v1(2804.33,1746.33) 2804.33,1878.33 2969,2043 3120,2043 3445,2368 3445,2728 3490,2773 v1(3490,2924)
ENA2+_BRK2_5V: DRV2.2 U5.4 | length 310.8
  Top Layer w10: DRV2.2 2774.02,1631.02 2854.33,1711.33 U5.4
ENA2-_BRK4: U3.21 U5.11 | length 2723.8
  Top Layer w10: U5.11 2854.33,2122.67 2794,2183 2042,2183 1968,2257 1968,2647 2029,2708 2711,2708 2975.44,2972.44 U3.21
ENA2-_BRK4_5V: DRV2.5 U5.10 | length 935.9
  Top Layer w10: U5.10 2904.33,2155.33 2936,2187 3022,2187 3148,2061 3148,1743 3074.02,1669.02 DRV2.5
GND_POWER: 3.3v.2 5v.2 Adj.3 BATT.2 C1.2 C2.2 C3.2 C4.1 C5.2 C6.2 C7.1 C8.1 C9.1 C10.1 C11.1 C12.1 C13.1 C14.1 C15.1 C16.1 C17.1 C20.1 C21.1 C22.1 C23.2 C24.1 CN.6 IMU1.1 IR_sensor.1 IR_sensor.14 IR_sensor.15 LCD.1 LCD.20 M1.Vin- M1.Vout- OC.6 PROG.3 PROG_SW.3 PROG_SW.4 R1.1 R6.1 R7.1 RFID_U1.3 RST.1 RST.2 SPI.1 SW1.1 SW2.1 SW.1 SW.2 TSOP.3 U1.1 U2.1 U3.15 U3.31 U3.36 U3.45 U3.65 U3.75 U4.7 U5.7 U6.15 U7.4 U8.8 U8.9 UART1.3 UART2.3 USS.3 Wifi_PROG.1 WIFI_RST.1 WIFI_RST.2 | length 339.2
  Top Layer w10: U3.15 3194.55,3090.55 3238,3134 v1(3243,3134) ; 3307.09,2780.09 U3.31 3307.09,2890.09 ; U3.36 3405.51,2889.49 ; 3582.68,2773.68 U3.45
  other v1: 3010,1746 3862,2506 3276,2747 4298,3330 4445,3759
IMU_SCL1: IMU1.2 U3.57 | length 1343.4
  Top Layer w10: U3.57 3921.19,3011.81 3921.5,3011.5 ; 3921.19,3011.5 3921.5,3011.5 ; IMU1.2 4152.1,2144.1 4192,2184 4192,2468 4015,2645 4015,2872 4065,2922 4065,2985 4039.13,3010.87 3962.54,3010.87 3961.91,3011.5 3921.5,3011.5
IMU_SDA1: IMU1.3 U3.56 | length 1169.9
  Top Layer w10: U3.56 3892.87,2992.13 3893.19,2991.81 ; 3892.87,2991.81 3893.19,2991.81 ; IMU1.3 4144.1,2244.1 4161,2261 4161,2462 3989,2634 3989,2884 4030,2925 4030,2973 4012.13,2990.87 3949.63,2990.87 3949,2991.5 3912.9,2991.5 3912.59,2991.81 3893.19,2991.81
IR1: IR_sensor.11 U3.6 | length 2758.3
  Top Layer w10: v1(2171,3096) 2377,3096 2573,3292 2632,3292 2699,3359 2836,3359 2861,3334 3027.31,3334 3093.28,3268.03 ; 3093.28,3267.72 U3.6
  Bottom Layer w10: IR_sensor.11 1800.39,1965.39 2231,2396 2231,3036 v1(2171,3096)
IR2: IR_sensor.10 U3.7 | length 3091.6
  Top Layer w10: v1(2274,3183) 2274,3377 2375,3478 v1(2667,3478) ; v1(2803,3305) 3015,3305 3071.97,3248.03 U3.7
  Bottom Layer w10: IR_sensor.10 1852,1612.57 1852,1957 2274,2379 v1(2274,3183) ; v1(2667,3478) 2667,3353 2715,3305 v1(2803,3305)
IR3: IR_sensor.9 U3.8 | length 2775.4
  Top Layer w10: v1(2981,3249) 3028.35,3249 3049,3228.35 U3.8
  Bottom Layer w10: IR_sensor.9 1900.39,1949.39 2302,2351 3019,2351 3100,2432 3100,3214 3065,3249 v1(2981,3249)
IR4: IR_sensor.8 U3.9 | length 2889.5
  Top Layer w10: U3.9 3187.66,3208.66 3248,3269 v1(3280,3269)
  Bottom Layer w10: IR_sensor.8 1952,1612.57 1952,1945 2332,2325 3046,2325 3131,2410 3131,3178 3222,3269 v1(3280,3269) v1@3285,3269
IR5: IR_sensor.7 U3.32 | length 2054.1
  Top Layer w10: v1(2517,2277) 2585,2345 3012,2345 3109,2442 3109,2651 3161,2703 3308,2703 3326.77,2721.77 U3.32
  Bottom Layer w10: IR_sensor.7 2000.39,1705.39 2517,2222 v1(2517,2277)
IR6: IR_sensor.6 U3.33 | length 2031.4
  Top Layer w10: v1(2793,2272) 2834,2313 3030,2313 3133,2416 3133,2640.28 3175.72,2683 3321,2683 3346.46,2708.46 U3.33
  Bottom Layer w10: IR_sensor.6 2151,1614.78 2151,1710 2713,2272 v1(2793,2272)
IR7: IR_sensor.5 U3.34 | length 2077.5
  Top Layer w10: v1(2598,2277) 2648,2227 2826,2227 2872,2273 3039,2273 3155,2389 3155,2629 3189,2663 3330,2663 3366.14,2699.14 U3.34
  Bottom Layer w10: IR_sensor.5 2100.39,1731.39 2598,2229 v1(2598,2277)
IR8: IR_sensor.4 U3.35 | length 2020.2
  Top Layer w10: v1(2864,2189) 2914,2239 3051,2239 3177,2365 3177,2612 3206,2641 3348,2641 3385.83,2678.83 U3.35
  Bottom Layer w10: IR_sensor.4 2247,1610.78 2247,1738 2698,2189 v1(2864,2189)
IR9: IR_sensor.3 U3.25 | length 2746.1
  Top Layer w10: v1(1677,1771) 2166,1771 2200.39,1736.61 IR_sensor.3 ; v1(2030,2406) 2030,2466 2156,2592 2739,2592 3040.7,2893.7 U3.25
  Bottom Layer w10: v1(1677,1771) 1677,1960 2030,2313 v1(2030,2406)
IR10: IR_sensor.17 U3.24 | length 2373.9
  Top Layer w10: v1(2028,2549) 2105,2626 2724,2626 3011.39,2913.39 3057.39,2913.39 U3.24
  Bottom Layer w10: IR_sensor.17 1500.39,1846.39 1963,2309 1963,2484 v1(2028,2549)
IR_LED_ON: IR_sensor.12 U3.17 | length 2530.8
  Top Layer w10: v1(2177,2510) 2797,2510 2995,2708 v1(2995,2753) ; v1(3052.18,3051.18) U3.17
  Bottom Layer w10: IR_sensor.12 1749,1615.57 1749,1974 2089,2314 2089,2463 2136,2510 v1(2177,2510) ; v1(2995,2753) 3052.18,2810.18 v1(3052.18,3051.18)
LED1: LED1.1 U3.60 | length 1264.6
  Top Layer w10: U3.60 4114.13,3070.87 ; 4114.13,3070.55 4166,3018.69 4166,2536 4368.07,2333.93 LED1.1
LED2: LED2.1 U3.61 | length 970.1
  Top Layer w10: U3.61 4132,3090.55 4197,3025.55 4197,2723 4244.53,2675.47 LED2.1
M\C\L\R\: PROG.1 R11.1 U3.13 | length 1359.2
  Top Layer w10: v1(2875,3075) 2929.92,3129.92 U3.13
  Bottom Layer w10: PROG.1 2457.48,2497.48 2994,3034 2994,3075 ; v1(2875,3075) 2994,3075 ; R11.1 3027.56,3108.56 2994,3075
MEMORY_SCK2: R18.1 U3.10 U7.6 | length 982.2
  Top Layer w10: v1(2600,2956) 2600,2982 2624.5,3006.5 U7.6 2753.5,3006.5 2778,3031 2778,3210 2812,3244 2865.31,3244 2920.02,3189.29 ; 2920.02,3188.98 U3.10
  Bottom Layer w10: v1(2600,2956) 2640.06,2996.06 R18.1
MEMORY_SDI2: U3.11 U7.2 | length 729.9
  Top Layer w10: U7.2 2562.5,3056.5 v1(2723,3217) ; v1(2835,3188) 2853.71,3169.29 U3.11
  Bottom Layer w10: v1(2723,3217) 2806,3217 v1(2835,3188)
MEMORY_SDO2: R17.1 U3.12 U7.5 | length 864.6
  Top Layer w10: v1(2692.91,2873.91) U7.5 2757.5,2956.5 2827,3026 2827,3104 2872.61,3149.61 U3.12
  Bottom Layer w10: R17.1 2633.96,2814.96 v1(2692.91,2873.91)
MEMORY_SS2#: R16.1 U3.14 U7.1 | length 1088.9
  Top Layer w10: U7.1 2561.5,3106.5 2633.97,3178.97 v1(2633.97,3248.03) ; v1(2867,3003) 2883,3003 2990.24,3110.24 U3.14
  Bottom Layer w10: R16.1 v1(2633.97,3248.03) 2633.97,3196.03 2663,3167 2791,3167 2822,3136 2822,3048 v1(2867,3003)
Net3.3v_1: 3.3v.1 R4.1 | length 98.4
  Top Layer w20: R4.1 3.3v.1
Net5v_1: 5v.1 R3.1 | length 100
  Top Layer w20: R3.1 2405.51,3916.63 5v.1
NetBATT_1: BATT.1 D1.2 | length 257.2
  Top Layer w120: BATT.1 1891.34,4221.65 D1.2
NetC14_2: C14.2 R10.1 R11.2 RST.3 RST.4 | length 1441.1
  Top Layer w10: RST.4 RST.3 v1(2921.91,3505.09)
  Bottom Layer w10: R10.1@2515.91,3504.09 R10.1 2515.75,3581.75 2590,3656 2798,3656 2834.65,3619.35 C14.2 2885.66,3541.34 v1(2921.91,3505.09) 2921.91,3439.91 2869,3387 2869,3248 2917.32,3199.68 R11.2
NetC15_2: C15.2 R13.2 TSOP.2 | length 712.4
  Bottom Layer w20: TSOP.2 1268.8,3525.2 1313.69,3480.31 R13.2 1453.69,3480.31 1496,3438 1496,3214 1449.32,3167.32 C15.2
NetC18_1: C18.1 U6.3 | length 167.8
  Bottom Layer w10: U6.3 5187.21,2437.21 5197.6,2447.6 C18.1
NetC18_2: C18.2 U6.1 | length 169.6
  Bottom Layer w10: U6.1 5177.79,2537.21 5192.6,2522.4 C18.2
NetC19_1: C19.1 U6.5 | length 287.5
  Bottom Layer w10: U6.5 5160.79,2337.21 5184,2314 5184,2206 5199.4,2190.6 C19.1
NetC19_2: C19.2 U6.4 | length 252.4
  Bottom Layer w10: U6.4 5201.79,2387.21 5258,2331 C19.2
NetC20_2: C20.2 U6.6 | length 635.3
  Bottom Layer w10: C20.2 4635,2149 4658,2126 4964,2126 4981,2143 4981,2235 5033.21,2287.21 U6.6
NetC21_2: C21.2 U6.2 | length 675.4
  Bottom Layer w10: C21.2 4634,2595 4681,2642 4960,2642 5003,2599 5003,2509 5024.79,2487.21 U6.2
NetI2C_1: I2C.1 U3.58 | length 721.2
  Top Layer w10: U3.58 3970.5,3031.5 3970.82,3031.18 ; 3970.5,3031.18 3970.82,3031.18 ; I2C.1 4054.61,2713.39 4042,2726 4042,2858 4098,2914 4098,2995 4062.13,3030.87 4043.53,3030.87 4043.22,3031.18 3970.82,3031.18
NetI2C_2: I2C.2 U3.59 | length 617.1
  Top Layer w10: U3.59 4051.82,3051.18 ; 4051.82,3050.87 4088,3050.87 4132,3006.87 4132,2850.9 I2C.2
NetI/O(5v)_1: I/O(5v).1 U3.95 | length 509.9
  Top Layer w10: 3121,3860 3121,3684 3307.09,3497.91 U3.95
NetI/O(5v)_2: I/O(5v).2 U3.96 | length 543.2
  Top Layer w10: 3021,3860 3021,3754 3287.4,3487.6 U3.96
NetI/O(5v)_3: I/O(5v).3 U3.97 | length 576.4
  Top Layer w10: 2921,3860 2921,3820 3267.72,3473.28 U3.97
NetLCD_19: LCD.19 R15.2 | length 2036.4
  Bottom Layer w10: R15.2 2852.88,4063.12 2979,3937 3643,3937 3837,4131 3907,4131 3951,4087 4421,4087 4505.12,4171.12 LCD.19
NetLED1_2: LED1.2 R6.2 | length 196.8
  Top Layer w20: R6.2 LED1.2
NetLED2_2: LED2.2 R7.2 | length 196.9
  Top Layer w20: R7.2 LED2.2
NetLED_1: LED.1 U3.4 | length 2336.5
  Top Layer w10: v1(1621.82,2943.82) 1918.82,2943.82 1948,2973 v1(1948,3017) ; v1(2331,3326) 2604,3326 2668,3390 2849,3390 2872,3367 3026,3367 3085.91,3307.09 U3.4
  Bottom Layer w10: LED.1 1188.7,2943.82 v1(1621.82,2943.82) ; v1(1948,3017) 1948,3225 2049,3326 v1(2331,3326)
NetLED_2: LED.2 R5.1 | length 216.4
  Bottom Layer w10: LED.2 1181.1,2774.9 1224.41,2731.59 R5.1
NetPROG_SW_1: PROG_SW.1 PROG_SW.2 U8.11 | length 1530.8
  Top Layer w10: PROG_SW.1 4509.45,4125.45 4653,4269 4938,4269 5309.36,3897.64 U8.11@5353.96,3897.64
  Top Layer w20: PROG_SW.2 4509.45,3653.9 PROG_SW.1
NetR12_2: R12.2 TSOP.1 | length 310.1
  Bottom Layer w20: TSOP.1 1181.1,3765.1 1224.41,3808.41 R12.2
NetR19_2: R19.2 U8.2 | length 223.3
  Top Layer w20: U8.2@4724.04,4055.12 v1(4858.27,4055.12)
  Bottom Layer w20: v1(4858.27,4055.12) R19.2
OC1: OC.2 U3.72 | length 2187.6
  Top Layer w10: U3.72 3795.09,3307.09 3832,3344 v1(3832,3415) ; v1(4465,3415) 5132,3415 5208,3339 5208,3051 5327.5,2931.5 OC.2
  Bottom Layer w10: v1(3832,3415) 3922,3415 3972,3465 4415,3465 v1(4465,3415)
OC2: OC.3 U3.76 | length 2217
  Top Layer w10: U3.76 3681.1,3470.1 v1(3727,3516) ; v1(4323,3536) 4336,3523 5160,3523 5260,3423 5260,3120 5348.5,3031.5 OC.3
  Bottom Layer w10: v1(3727,3516) 3757,3546 4313,3546 v1(4323,3536)
OC3: OC.4 U3.77 | length 2235.7
  Top Layer w10: U3.77 3661.42,3551 v1(3700.42,3590) ; v1(4411,3563) 4416,3558 5189,3558 5335,3412 5335,3183 5386.5,3131.5 OC.4
  Bottom Layer w10: v1(3700.42,3590) 4384,3590 v1(4411,3563)
OC4: OC.5 U3.78 | length 2412.1
  Top Layer w10: U3.78 3641.73,3685.73 v1(3680,3724) ; v1(4423,3665) 4423,3629 4460,3592 5230,3592 5372,3450 5372,3292.57 OC.5
  Bottom Layer w10: v1(3680,3724) 3774,3630 4388,3630 v1(4423,3665)
OSC1_P: C6.1 R14.1 U3.63 Y1.1 | length 613.5
  Top Layer w10: U3.63 3870.92,3129.92 3969.35,3228.35 Y1.1 4081.09,3274 C6.1
  Bottom Layer w10: Y1.1 4090.55,3228.35 R14.1
OSC2_P: C5.1 R14.2 U3.64 Y1.2 | length 739.9
  Top Layer w10: U3.64 3858.61,3149.61 4035.43,3326.43 Y1.2 4086.8,3425.2 4128,3384 C5.1
  Bottom Layer w10: Y1.2 4090.55,3425.2 R14.2
PGEC1: PROG.5 U3.26 | length 591.1
  Top Layer w10: PROG.5 2857.48,2512.48 3090,2745 3182,2745 3208.66,2771.66 U3.26
PGED1: PROG.4 U3.27 | length 864.7
  Top Layer w10: PROG.4 2757.48,2399.52 2778,2379 2995,2379 3081,2465 3081,2659 3145,2723 3191,2723 3228.35,2760.35 U3.27
PWM1H: U3.94 U4.1 | length 410.5
  Top Layer w10: v1(3264,3628) 3289,3603 3289,3547 3326.77,3509.23 U3.94 ; v1(3393.31,1668.69) U4.1
PWM1H_5V: DRV1.1 U4.2 | length 317.7
  Top Layer w10: U4.2 3443.31,1712.69 3540.16,1615.84 DRV1.1
PWM2H: U3.99 U4.9 | length 433.7
  Top Layer w10: v1(3020,3638) 3066,3638 3228.35,3475.65 U3.99 ; U4.9 3643.31,2114.31 v1(3672,2143)
PWM2H_5V: DRV1.4 U4.8 | length 570.2
  Top Layer w10: U4.8 3759.73,2045.27 3810,1995 3810,1604.96 DRV1.4
PWM3H: U3.3 U5.1 | length 2419.2
  Top Layer w10: v1(2666,1756) 2704.33,1794.33 U5.1 ; U3.3 3208.77,3326.77 3237,3355 3369,3355 v1(3396,3328)
  Bottom Layer w10: v1(2666,1756) 2666,1801 2946,2081 3096,2081 3197,2182 3197,2593 ; 3196.87,2591 3196.87,3144.87 3247,3195 3369,3195 3396,3222 v1(3396,3328)
PWM3H_5V: DRV2.1 U5.2 | length 310.8
  Top Layer w10: DRV2.1 2674.02,1697.02 2754.33,1777.33 U5.2
PWM4H: U3.5 U5.9 | length 1782.1
  Top Layer w10: U5.9 v1(2954.33,2137.33) ; U3.5 3219.4,3287.4 3257,3325 3323,3325 3347,3301 v1(3347,3268)
  Bottom Layer w10: v1(2954.33,2137.33) 3089.33,2137.33 3168,2216 3168,3157 3234,3223 3336,3223 3347,3234 v1(3347,3268)
PWM4H_5V: DRV2.4 U5.8 | length 605.8
  Top Layer w10: DRV2.4 2974.02,1634.02 3112,1772 3112,1995 3061.73,2045.27 U5.8
R/W: LCD.5 U3.88 | length 1587.9
  Top Layer w10: v1(3149,4097) 3257,4097 3395,3959 3395,3584 3444.88,3534.12 U3.88
  Bottom Layer w10: v1(3149,4097) 3621.41,4097 LCD.5
RESET_LCD: LCD.17 U3.66 | length 1546.1
  Top Layer w10: U3.66 3865.98,3188.98 3999,3322 3999,3627 4132,3760 4315,3760 4405.12,3850.12 LCD.17
RESET_WIFI: C24.2 R20.1 U3.74 U8.0 Wifi_PROG.5 WIFI_RST.3 WIFI_RST.4 | length 4329.5
  Top Layer w10: U3.74 3795.46,3346.46 3804,3355 3804,3377 3784,3397 3784,3447 v1(3830,3493) ; v1(4601,3681) 4601,4149 4664.6,4212.6 4907.4,4212.6 v1(4916.4,4203.6) 4916.4,4202.6 5169.14,3949.86 v1(5169.14,3758.14)
  Top Layer w20: C24.2 4682.4,2858.6 4737.99,2803.01 WIFI_RST.3 4970,2803.01 ; Wifi_PROG.5 5042.52,2875.53 4970,2803.01 ; WIFI_RST.4 4970,2803.01
  Bottom Layer w10: v1(3830,3493) 4517,3493 4601,3577 v1(4601,3681) ; Wifi_PROG.5 5042.52,3631.52 v1(5169.14,3758.14)
  Bottom Layer w20: v1(4916.4,4203.6) 5065,4055 R20.1
RS: LCD.4 U3.87 | length 1861.3
  Top Layer w10: v1(3044,4143) 3257,4143 3421,3979 3421,3590 3464.57,3546.43 U3.87
  Bottom Layer w10: v1(3044,4143) 3596,4143 3657,4204 3657,4332.59 LCD.4 ; LCD.4@3703.7,4380.71 LCD.4@3703.7,4392.3
SPI1_SCK1: SPI.5 U3.55 | length 2386.8
  Top Layer w10: U3.55 3950.56,2972.44 v1(3979,2944) ; v1(5269,2746) 5353,2662 5353,2314 5380.39,2286.61 SPI.5
  Bottom Layer w10: v1(3979,2944) 4100,2944 4351,3195 4820,3195 v1(5269,2746)
SPI1_SDI1: SPI.3 U3.54 | length 2612.1
  Top Layer w10: U3.54 3859.24,2952.76 v1(3893,2919) ; v1(5160.5,2623.5) 5217.5,2623.5 5269,2572 5269,2145 5327.39,2086.61 SPI.3
  Bottom Layer w10: v1(3893,2919) 3925.43,2919 3946.43,2898 4098,2898 4366,3166 4772,3166 5160.5,2777.5 v1(5160.5,2623.5)
SPI1_SDO1: SPI.4 U3.53 | length 2554.5
  Top Layer w10: U3.53 3816.93,2933.07 3895,2855 v1(3931,2855) ; v1(5028,2687) 5262,2687 5314,2635 5314,2232 5359.39,2186.61 SPI.4
  Bottom Layer w10: v1(3931,2855) 3944,2868 4112,2868 4375,3131 4737,3131 5028,2840 v1(5028,2687)
SPI1_SS1#: SPI.2 U3.23 | length 3491.7
  Top Layer w10: U3.23 3263.07,2933.07 3323,2993 v1(3370,2993) ; v1(5127,3144) 5127,3072 5324,2875 5324,2774 5492,2606 5492,2003 5475.61,1986.61 SPI.2
  Bottom Layer w10: v1(3370,2993) 4103,2993 4335,3225 5046,3225 v1(5127,3144)
SW1: C13.2 R8.1 SW1.2 SW.3 SW.4 U3.18 | length 1602.9
  Top Layer w10: U3.18 3219.5,3031.5 v1(3254,2997) ; SW1.2 3353.54,2383.46 3367.05,2369.95 SW.3 3627.29,2369.95 v1(3643.17,2385.83) 3659.05,2369.95 SW.4
  Bottom Layer w10: v1(3254,2997) 3231,2974 3231,2641 3349,2523 3349,2406 3326.46,2383.46 SW1.2 ; R8.1 v1(3643.17,2385.83) 3677.83,2385.83 3695.54,2403.54 C13.2
SW2: R9.2 SW2.2 U3.19 | length 3441.3
  Top Layer w10: SW2.2 1434.67,2245.67 1489,2300 1489,3105 1522,3138 1950,3138 2001,3087 2001,2796 2020,2777 2709,2777 2943.81,3011.81 U3.19
  Bottom Layer w20: SW2.2 1181.1,2173.9 1224.41,2130.59 R9.2
TSOP_IN: R12.1 U3.22 | length 3249.4
  Top Layer w10: v1(1962,3777) 2033,3706 2033,3003 v1(2122,2914) ; v1(2033,2628) 2072,2667 2714,2667 2999.76,2952.76 U3.22
  Bottom Layer w10: R12.1 1334.65,3810.35 1368,3777 v1(1962,3777) ; v1(2033,2628) 2033,2825 v1(2122,2914)
U1_RS232_RX: U6.13 UART1.2 | length 1051.9
  Top Layer w10: v1(4757,2511) 4751,2505 4751,2094 v1(4775,2070)
  Bottom Layer w10: v1(4757,2511) 4757,2448 4817.79,2387.21 U6.13 ; v1(4775,2070) 4813,2032 4951,2032 5018.11,1964.89 UART1.2
U1_RS232_TX: U6.14 UART1.1 | length 1139.8
  Top Layer w10: v1(4709,2067) 4709,2566 v1(4728,2585)
  Bottom Layer w10: v1(4709,2067) 4780,1996 4882,1996 4918.11,1959.89 UART1.1 ; v1(4728,2585) 4764,2585 4807,2542 4807,2454 4823.79,2437.21 U6.14
U1RX: RFID_U1.1 U3.52 U6.12 | length 2760.6
  Top Layer w10: U3.52 3800.61,2913.39 ; 3800.61,2913.07 3964,2749.69 3964,2620 4037,2547 4037,2000 4066,1971 4180,1971 4297,1854 v1(4370,1854)
  Bottom Layer w10: RFID_U1.1 4366.93,1850.93 v1(4370,1854) 4412,1896 4412,2302 4500,2390 4733,2390 4785.79,2337.21 U6.12
U1TX: U3.51 U6.11 | length 2556.6
  Top Layer w10: U3.51 3783.3,2893.7 3939,2738 3939,2607 4010,2536 4010,1988 4054.75,1943.25 4169.75,1943.25 4313,1800 v1(4434,1800)
  Bottom Layer w10: v1(4434,1800) 4477,1843 4477,2323 4513,2359 4720,2359 4791.79,2287.21 U6.11
U2_RS232_RX: U6.8 UART2.2 | length 997.4
  Bottom Layer w10: UART2.2 5018.11,1640.11 5071,1693 5251,1693 5311,1753 5311,2031 5249,2093 5132,2093 5094.49,2130.51 U6.8
U2_RS232_TX: U6.7 UART2.1 | length 1135.1
  Bottom Layer w10: UART2.1 4918.11,1658.11 5016,1756 5207,1756 5245,1794 5245,1992 5198,2039 5075,2039 5018,2096 5018,2208 5047.21,2237.21 U6.7
U2RX: U3.49 U6.9 U8.15 Wifi_PROG.4 | length 5046
  Top Layer w10: U3.49 3661.42,2767.58 3707,2722 v1(3819,2722) ; v1(4252,1973) 4293,1932 v1(4572,1932) ; v1(4372,2796) 4320,2848 4320,3090 4453,3223 4914,3223 4942.52,3251.52 Wifi_PROG.4 ; v1(5201,4117) 5203,4119 5203,4154 5261.6,4212.6 U8.15@5353.96,4212.6
  Bottom Layer w10: v1(3819,2722) 3987,2554 4219,2554 ; v1(4252,1973) 4252,2521 4219,2554 ; v1(4372,2796) 4299,2723 4299,2634 4219,2554 ; v1(4572,1932) 4533,1971 4533,2302 4560,2329 4689,2329 4716,2302 4716,2202 4755,2163 4822,2163 4846.21,2187.21 U6.9 ; Wifi_PROG.4 4942.52,3629.52 5201,3888 v1(5201,4117)
U2TX: U3.50 U6.10 U8.14 Wifi_PROG.3 | length 4815.2
  Top Layer w10: U3.50 3681.1,2780.9 3694,2768 v1(3753,2768) ; v1(4289,2806) 4289,3103 4443,3257 4818,3257 4842.52,3281.52 Wifi_PROG.3 ; v1(4803.79,2229.21) 4819,2244.41 4819,2687 4880,2748 5190,2748 5235,2793 v1(5235,2878) ; v1(5250.5,4050.5) 5250.5,4088.5 5295.86,4133.86 U8.14@5353.96,4133.86
  Bottom Layer w10: v1(3753,2768) 3841,2768 4019,2590 4201,2590 4261,2650 4261,2778 v1(4289,2806) ; v1(4803.79,2229.21) 4803.79,2237.21 U6.10 ; Wifi_PROG.3 4842.52,3281.48 4868,3256 5216,3256 ; v1(5235,2878) 5235,3237 5216,3256 ; v1(5250.5,4050.5) 5250.5,3290.5 5216,3256
USS_IN: U3.38 USS.2 | length 6991.4
  Top Layer w10: USS.2 2383.47,4418.53 2364,4438 1550,4438 1388,4276 1388,2533 1323,2468 1153,2468 1115,2430 1115,1864 1366,1613 2373,1613 2455,1695 v1(2455,1798) ; v1(3084,2204) 3203,2323 3203,2600 3222,2619 3378,2619 3444.88,2685.88 U3.38
  Bottom Layer w10: v1(2455,1798) 2785,2128 2878,2128 2954,2204 v1(3084,2204)
V0: Adj.2 LCD.3 | length 399.9
  Top Layer w10: LCD.3 3705.12,4029.88 3747.68,3987.32 Adj.2
VEE: Adj.1 LCD.18 | length 1303
  Top Layer w10: v1(4126,3678) 4126,3711 4143,3728 4342,3728 4455,3841 4455,4330.83 LCD.18
  Bottom Layer w10: Adj.1 3936.58,3715.42 3974,3678 v1(4126,3678)
VOLT_MEASURE: R1.2 R2.1 U3.91 | length 2313.7
  Top Layer w10: v1(2267,3884) 2309,3842 v1(2309,3636) ; v1(3197,3717) 3253,3717 3328,3642 3328,3544 3385.83,3486.17 U3.91
  Bottom Layer w10: R1.2 1814.96,3860.04 1841,3834 1991,3834 2041,3884 v1(2267,3884) ; v1(2309,3636) 2402,3636 2483,3717 v1(3197,3717)
  Bottom Layer w20: R2.1 R1.2
pads on no net: IR_sensor.18 IR_sensor.19 IR_sensor.20 PROG.6 U1.0 U2.0 U3.1 U3.28 U3.29 U3.73 U3.92 U3.93 U3.98 U3.100 U8.1 U8.3 U8.4 U8.5 U8.6 U8.10 U8.12 U8.13

## Polygon pours and split planes (outlines as drawn)
GND_POWER on Top Layer "Top Layer-GND Net" (solid, pour order 14): 984.25,1377.95 5629.92,1377.95 5629.92,4566.93 984.25,4566.93
GND_POWER on Bottom Layer "Bottom Layer-GND Net" (solid, pour order 15): 984.25,1377.95 5629.92,1377.95 5629.92,4566.93 984.25,4566.93

## Other copper
Bottom Layer:
  rectangle: 1748,2815 1968,2885
  rectangle: 1616,3506 1832,3711
  rectangle: 1552,3363 1965,3517
  rectangle: 1422,2616 1967,2825

## Silkscreen, mask and mechanical layers (free items; w line width, h text height)
Top Overlay:
  lines w9: 1417.32,3917.32 1909.45,3917.32
  text "SmartCart" at 1203,4241 h55 r270
  text "v2.0" at 1104,4128 h60 r270
  text "12v Gnd 24v" at 1929.13,3996.06 h50 r180
Bottom Overlay:
  circle w9: c1241,1760 r60
  text "TIM" at 1288,1741 h40

## Text inside footprints (layer, text, board x,y; h text height)
BATT: Top Overlay "1" at 1960.39,4262.6 h59.06 r180
CN: Top Overlay "1" at 3350.87,4400.08 h59.06 r180
DRV1: Top Overlay "1" at 3460.16,1544.8 h59.06
DRV2: Top Overlay "1" at 2594.02,1544.8 h59.06
I2C: Top Overlay "1" at 4124.49,2643.39 h59.06 r90
I/O(5v): Top Overlay "1" at 3191,3890 h59.06 r180
IMU1: Top Overlay "1" at 4124.49,1964.09 h59.06 r90
IR_sensor: Top Overlay "2" at 2352.39,1542.17 h39.37; Top Overlay "1" at 2361.39,1643.17 h39.37
LCD: Top Overlay "2" at 3553.12,4402.71 h39.37 r180; Top Overlay "1" at 3544.12,4301.71 h39.37 r180
LED: Top Overlay "1" at 1151.1,3006.22 h59.06 r270
OC: Top Overlay "1" at 5463.07,2751.5 h59.06 r90
PROG: Top Overlay "1" at 2377.48,2410.94 h59.06
RFID_U1: Top Overlay "1" at 4296.93,1544.8 h59.06
SPI: Top Overlay "1" at 5463.07,1806.61 h59.06 r90
SW1: Top Overlay "1" at 3237.72,2553.46 h59.06 r270
SW2: Top Overlay "1" at 1151.1,2415.67 h59.06 r270
TSOP: Top Overlay "1" at 1151.1,3695.2 h59.06 r270
UART1: Top Overlay "1" at 4848.11,1859.76 h59.06
UART2: Top Overlay "1" at 4848.11,1544.8 h59.06
USS: Top Overlay "1" at 2553.46,4400.08 h59.06 r180
Wifi_PROG: Top Overlay "1" at 4562.52,3321.46 h59.06